# Altium PCB PCB1.PcbDoc
Units mm, origin at the board's own origin, x right, y up, seen from the top; angles counter-clockwise.
Board outline 34.04 x 26.8 mm, 2 copper layers (Top Layer, Bottom Layer); 10 components, 8 nets, 27 pads, 0 vias.
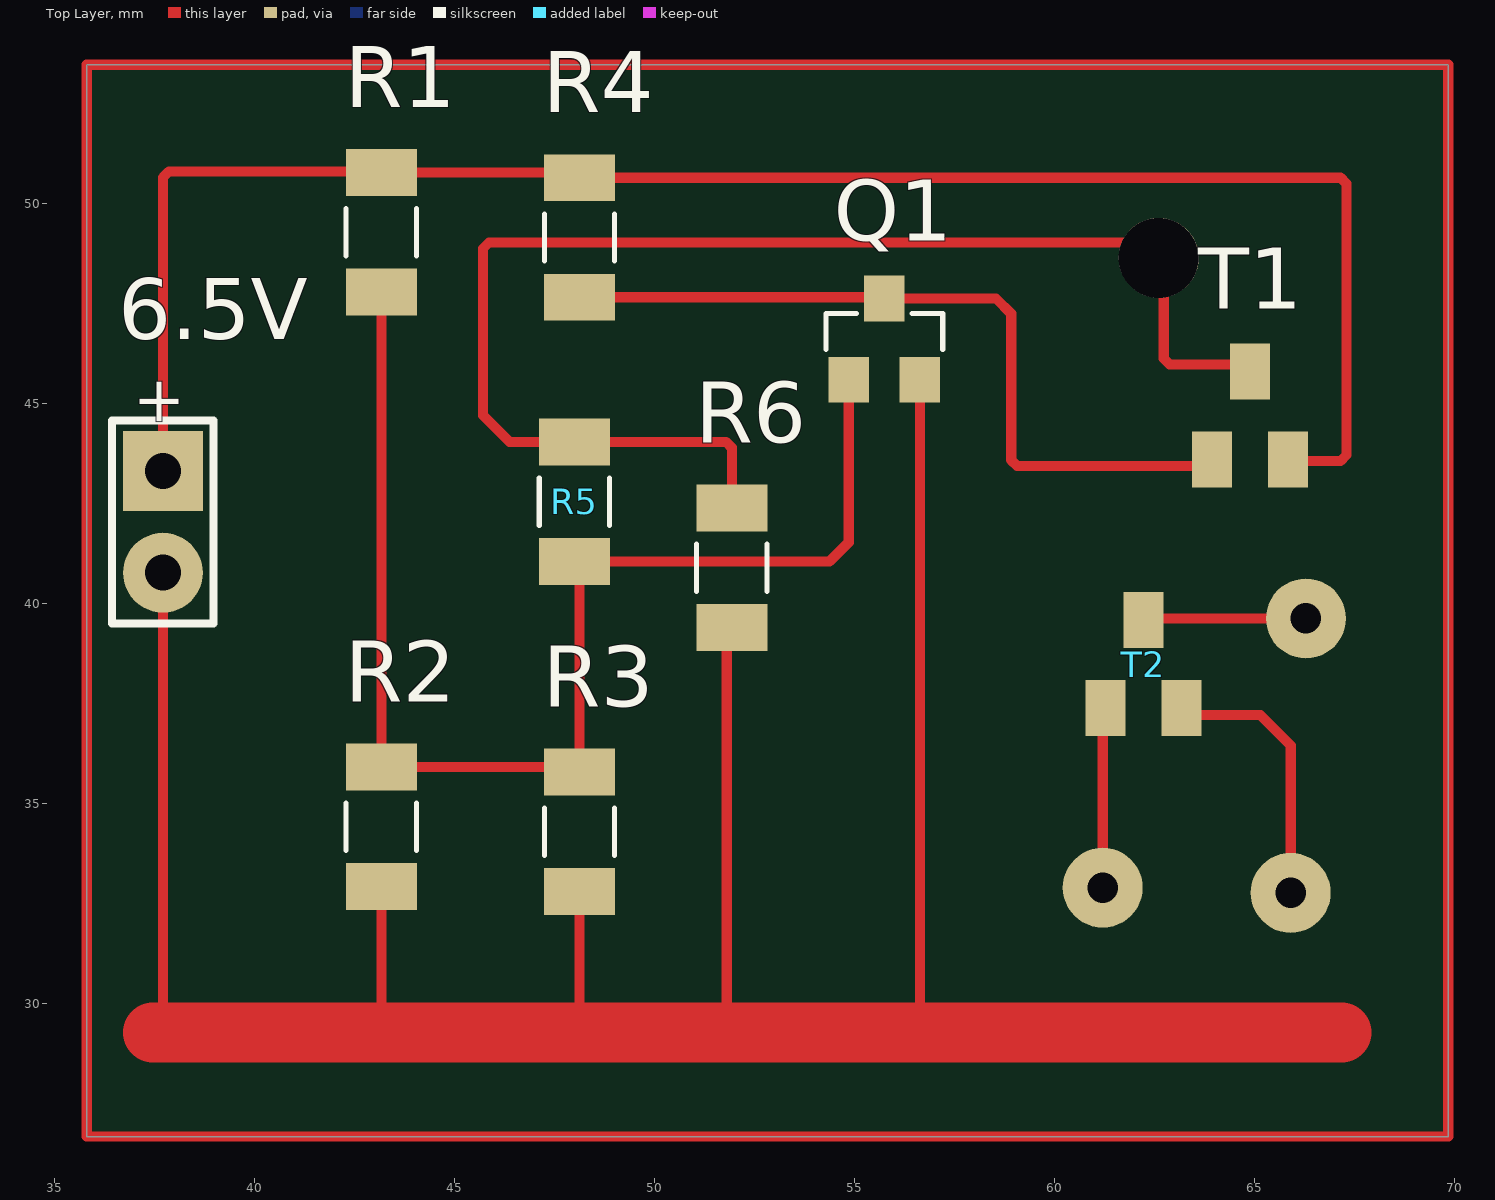
[diagram p0: Top Layer view]
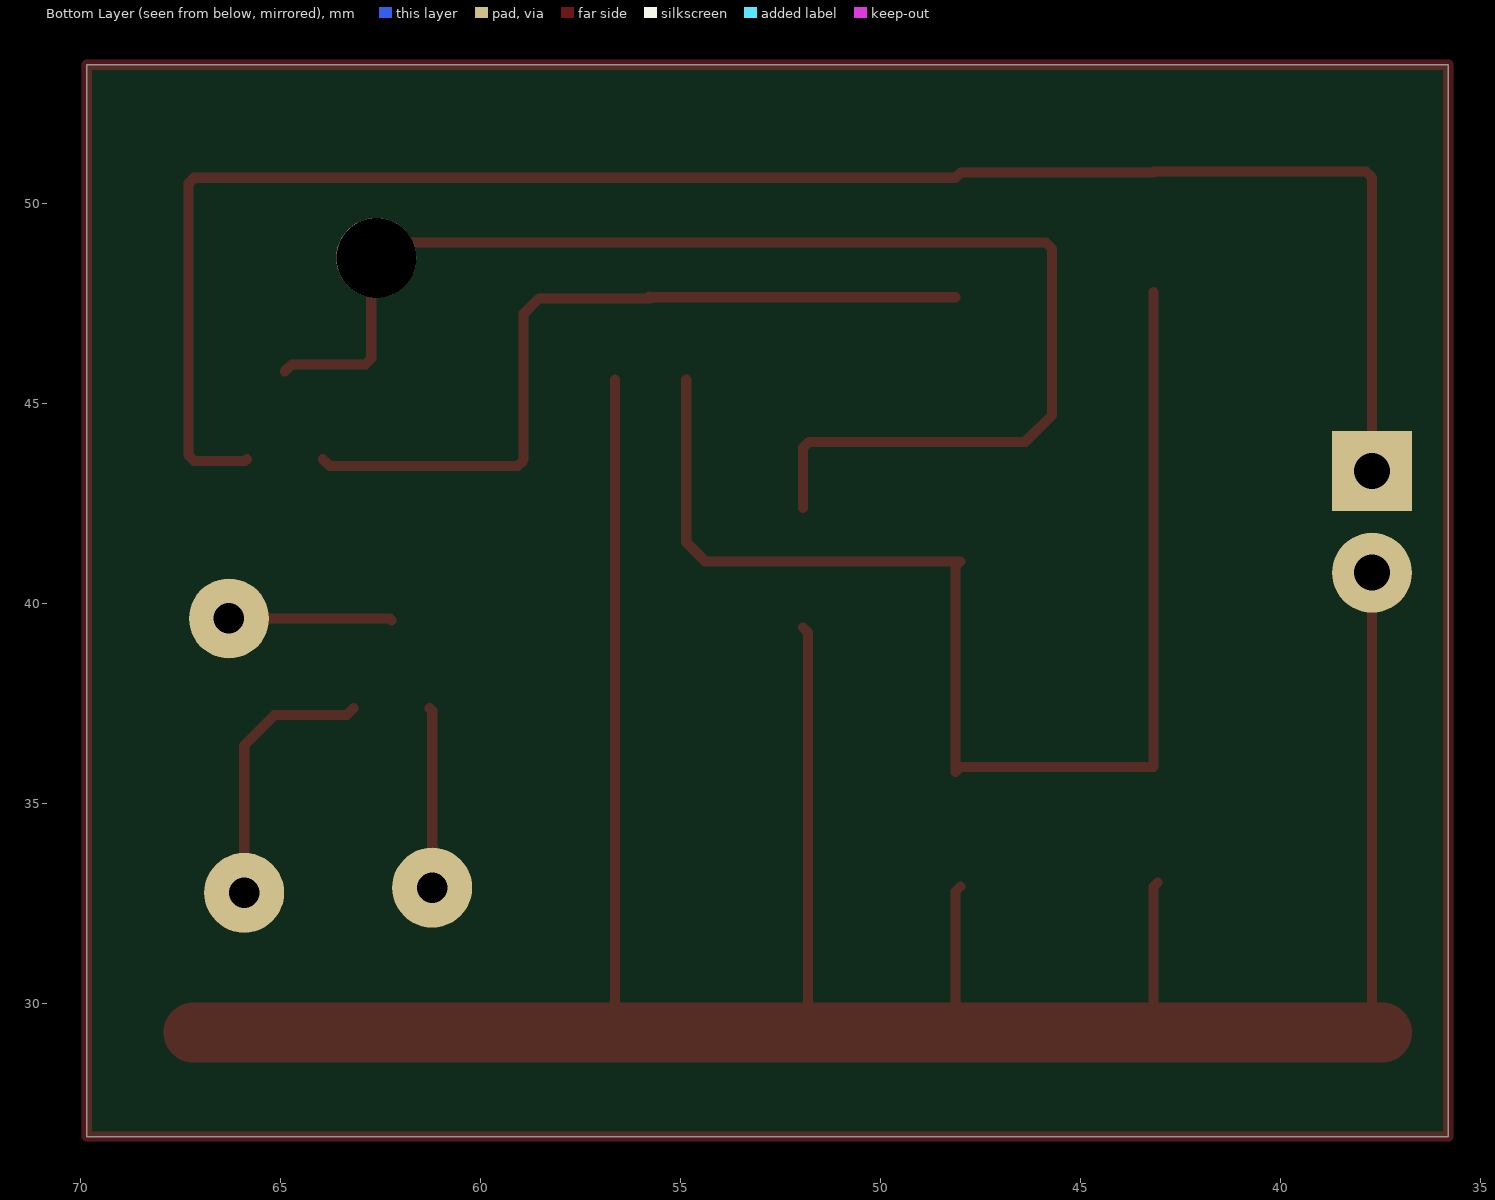
[diagram p1: Bottom Layer view, seen from below]
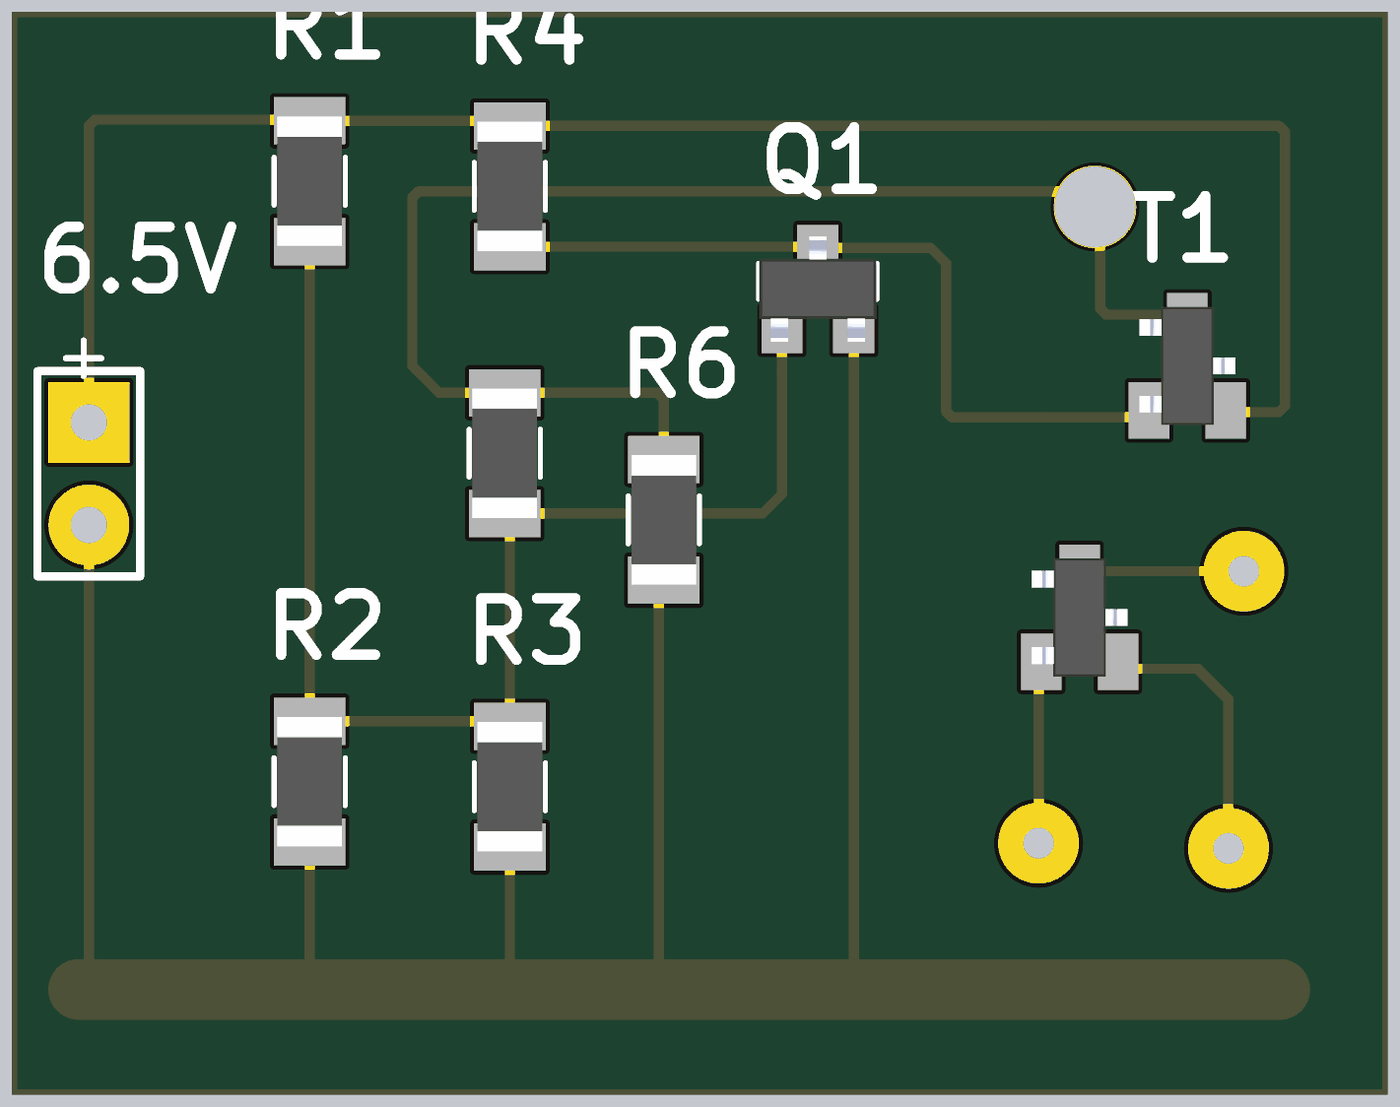
[diagram p2: 3D render of the assembled board from above, using the file's embedded part models]

## Layer stack, top to bottom
Top Solder: solder mask 0.0102, Solder Resist, Dk 3.5
Top Layer: signal copper 0.0356
Dielectric 1: dielectric 0.32, FR-4, Dk 4.8
Bottom Layer: signal copper 0.0356
Bottom Solder: solder mask 0.0102, Solder Resist, Dk 3.5

## Board outline
35.814,26.67 35.814,53.467 69.85,53.467 69.85,26.67

## Design rules (kind name [scope] priority, off if disabled: settings)
Clearance [All] p1: gap=0.254 ignorepadtopadclearanceinfootprint=FALSE
PolygonConnect [All] p1: connectstyle=Relief reliefconductorwidth=0.254 reliefentries=4 polygonreliefangle="90 Angle" airgapwidth=0.254
RoutingVias [All] p1: holewidth=0.711 width=1.27 viastyle="Through Hole" minholewidth=0.711 minwidth=1.27 maxholewidth=0.711 maxwidth=1.27
SolderMaskExpansion [All] p1: expansion=0.102 istentingtop=FALSE
Width [All] p1: maxlimit=0.254 minlimit=0.254 preferedwidth=0.254
30 further rules are at their usual default settings.

## Components (designator, comment, footprint, x,y, rotation, side; value= is the part's Value field where it differs from the comment)
6.5V "Battery" BAT-2 37.719,42.037 r270 top
Q1 "SMD-TRANSISTORS-NPN-25V-500MW(SOT-23)" SOT-23 55.753,46.609 r0 top
R1 "10K" RESC3216X75N 43.18,49.276 r90 top
R2 "2K" RESC3216X75N 43.18,34.417 r90 top
R3 "Variable" RESC3216X75N 48.133,34.29 r90 top
R4 "10K" RESC3216X75N 48.133,49.149 r90 top
R5 "100K" RESC3216X75N 48.006,42.545 r90 top
R6 "10K" RESC3216X75N 51.943,40.894 r90 top
T1 "SI2301" DESTO_SOT23 64.897,44.704 r0 top
T2 "SI2301" DESTO_SOT23 62.23,38.481 r0 top

## Footprints (in the part's own frame and the unit in brackets; to place one, negate y for a bottom-side part, rotate by r counter-clockwise, add the part's x,y. Pads: shape width x height; smd on the part's side, far side on the other; paste and mask are expansions set on the pad)
BAT-2 [mm] "Battery; 2 Leads"
  rect 2x2 hole 0.9: 1(-1.27,0)
  round 2 hole 0.9: 2(1.27,0)
  silkscreen extent -2.54,-1.27 2.54,1.27
DESTO_SOT23 [mm]
  rect 1x1.4 smd: 1(-0.95,-1.1) 2(0.95,-1.1) 3(0,1.1)
  body extent -1.18,-1.46 1.18,1.46, height 1.25
RESC3216X75N [mm]
  rect 1.17x1.77 smd: 1(-1.494,0) 2(1.494,0)
  silkscreen extent -0.59,-0.88 0.59,0.88, body extent -1.6,-0.8 1.6,0.8, height 0.75
SOT-23 [mil]
  rect 40x45 smd: 1(-35,-40) 2(35,-40) 3(0,40)
  silkscreen extent -58,-10 58,25, body extent -57,-51 57,51, height 55

## Part data
6.5V: "Multicell Battery", LatestRevisionDate=17-Jul-2002, LatestRevisionNote="Re-released for DXP Platform.", PackageDescription="Battery; 2 Leads", PackageReference=BAT-2, Published=24-Mar-1999, Publisher="Altium Limited"
Q1: "Bipolar (BJT) Transistor NPN 25 V 500 mA 150MHz 300 mW Surface Mount SOT-23", Package=None, Availability="In Stock", Check_prices=https://www.snapeda.com/parts/S8050/Umwelt+Sensor+Teknik/view-part/?ref=eda, MF=UMW, MP=S8050, Price=None, Purchase-URL=https://pricing.snapeda.com/search/part/S8050/?ref=eda, SnapEDA_Link=https://www.snapeda.com/parts/S8050/Umwelt+Sensor+Teknik/view-part/?ref=snap
R1 R2 R3 R4 R5 R6: library part CR1206-J/-000ELF, "CR1206 SMD Thick Film Resistor,jumper 0R", Package="3216 Bourns", Check_prices=https://www.snapeda.com/parts/CR1206-J/-000ELF/Bourns/view-part/?ref=eda, MF=Bourns, MP=CR1206-J/-000ELF, SnapEDA_Link=https://www.snapeda.com/parts/CR1206-J/-000ELF/Bourns/view-part/?ref=snap
T1 T2: "MOSFET P-CH 20V 2.2A SOT23-3", Package="SOT-23 MCC", Check_prices=https://www.snapeda.com/parts/SI2301/Micro+Commercial+Components/view-part/?ref=eda, MF="Micro Commercial Components (MCC)", MP=SI2301, SnapEDA_Link=https://www.snapeda.com/parts/SI2301/Micro+Commercial+Components/view-part/?ref=snap

## Free pads (board coordinates)
  round 2 hole 0.762: 82(61.214,32.893) 83(65.913,32.766) 84(66.294,39.624)
  round 2 hole 2: 88(62.611,48.641)

## Nets (pads, with @x,y where several pads share a name; then routed paths per layer and width w, separated by ;. In a path a pad name is that pad's centre, name@x,y a point inside that pad or via, vN(x,y) a via of type N, cw(c..) or ccw(c..) an arc to the next point about the centre after c; other vN are vias at no path point)
Base: Q1.1 R1.1 R2.2 R3.2 R5.1 | length 33.3
  Top Layer w0.254: R1.1 R2.2 48.006,35.911 R3.2 48.133,40.924 R5.1 54.386,41.051 54.864,41.529 Q1.1
Drain_2: pad.84 T2.3 | length 4.1
  Top Layer w0.254: T2.3 62.273,39.624 pad.84
Gate: Q1.3 R4.1 T1.1 | length 19.8
  Top Layer w0.254: R4.1 55.723,47.655 Q1.3 ; Q1.3@55.796,47.668 Q1.3 ; T1.1 63.777,43.434 59.077,43.434 58.928,43.583 58.928,47.244 58.547,47.625 Q1.3
Gate_2: pad.82 T2.1 | length 4.5
  Top Layer w0.254: pad.82 61.214,37.315 T2.1
GND: 6.5V.2 Q1.2 R2.1 R3.1 R6.1 | length 75.7
  Top Layer w0.254: 37.465,29.273 37.529,29.337 37.529,29.464 37.719,29.527 6.5V.2 ; 43.053,29.273 43.18,29.4 R2.1 R2.1@43.083,33.02 ; 47.879,29.273 48.133,29.527 R3.1 R3.1@48.006,32.923 ; 51.562,29.273 51.816,29.527 51.816,32.796 51.816,39.273 R6.1 ; 56.388,29.273 56.642,29.527 Q1.2
  Top Layer w1.5: 37.465,29.273 43.053,29.273 47.879,29.273 51.562,29.273 56.388,29.273 67.183,29.273
Output: pad.88 R5.2 R6.2 T1.3 | length 34.5
  Top Layer w0.254: R6.2 51.943,43.89 51.794,44.039 R5.2 46.385,44.039 45.72,44.704 45.72,48.873 45.869,49.022 62.738,49.022 62.738,46.123 62.887,45.974 64.727,45.974 T1.3
Source_2: pad.83 T2.2 | length 6.8
  Top Layer w0.254: T2.2 63.35,37.211 65.151,37.211 65.913,36.449 pad.83
VCC: 6.5V.1 R1.2 R4.2 T1.2 | length 45.5
  Top Layer w0.254: 6.5V.1 37.719,50.651 37.868,50.8 43.15,50.8 R1.2 48.006,50.77 R4.2 67.161,50.643 67.31,50.494 67.31,43.71 67.161,43.561 65.89,43.561 T1.2
copper on no net: | length 121.7
  Top Layer w0.254: 35.814,26.67 69.85,26.67 69.85,53.467 35.814,53.467 35.814,26.67

## Text inside footprints (layer, text, board x,y; h text height)
6.5V: Top Overlay "+" at 37.142,45.707 h1.15 r270